# Altium PCB AtlysAFE.PcbDoc (part 2 of 2)
Units mm, origin at the board's own origin, x right, y up, seen from the top; angles counter-clockwise.
Board outline 100 x 101.6 mm, 6 copper layers (Top Layer, Internal Plane 1, Internal Plane 2, Internal Plane 3, Internal Plane 4, Bottom Layer), stack 1.611 mm thick; 311 components, 255 nets, 1157 pads, 209 vias.
Unrouted connection lines stored in the file: 701.
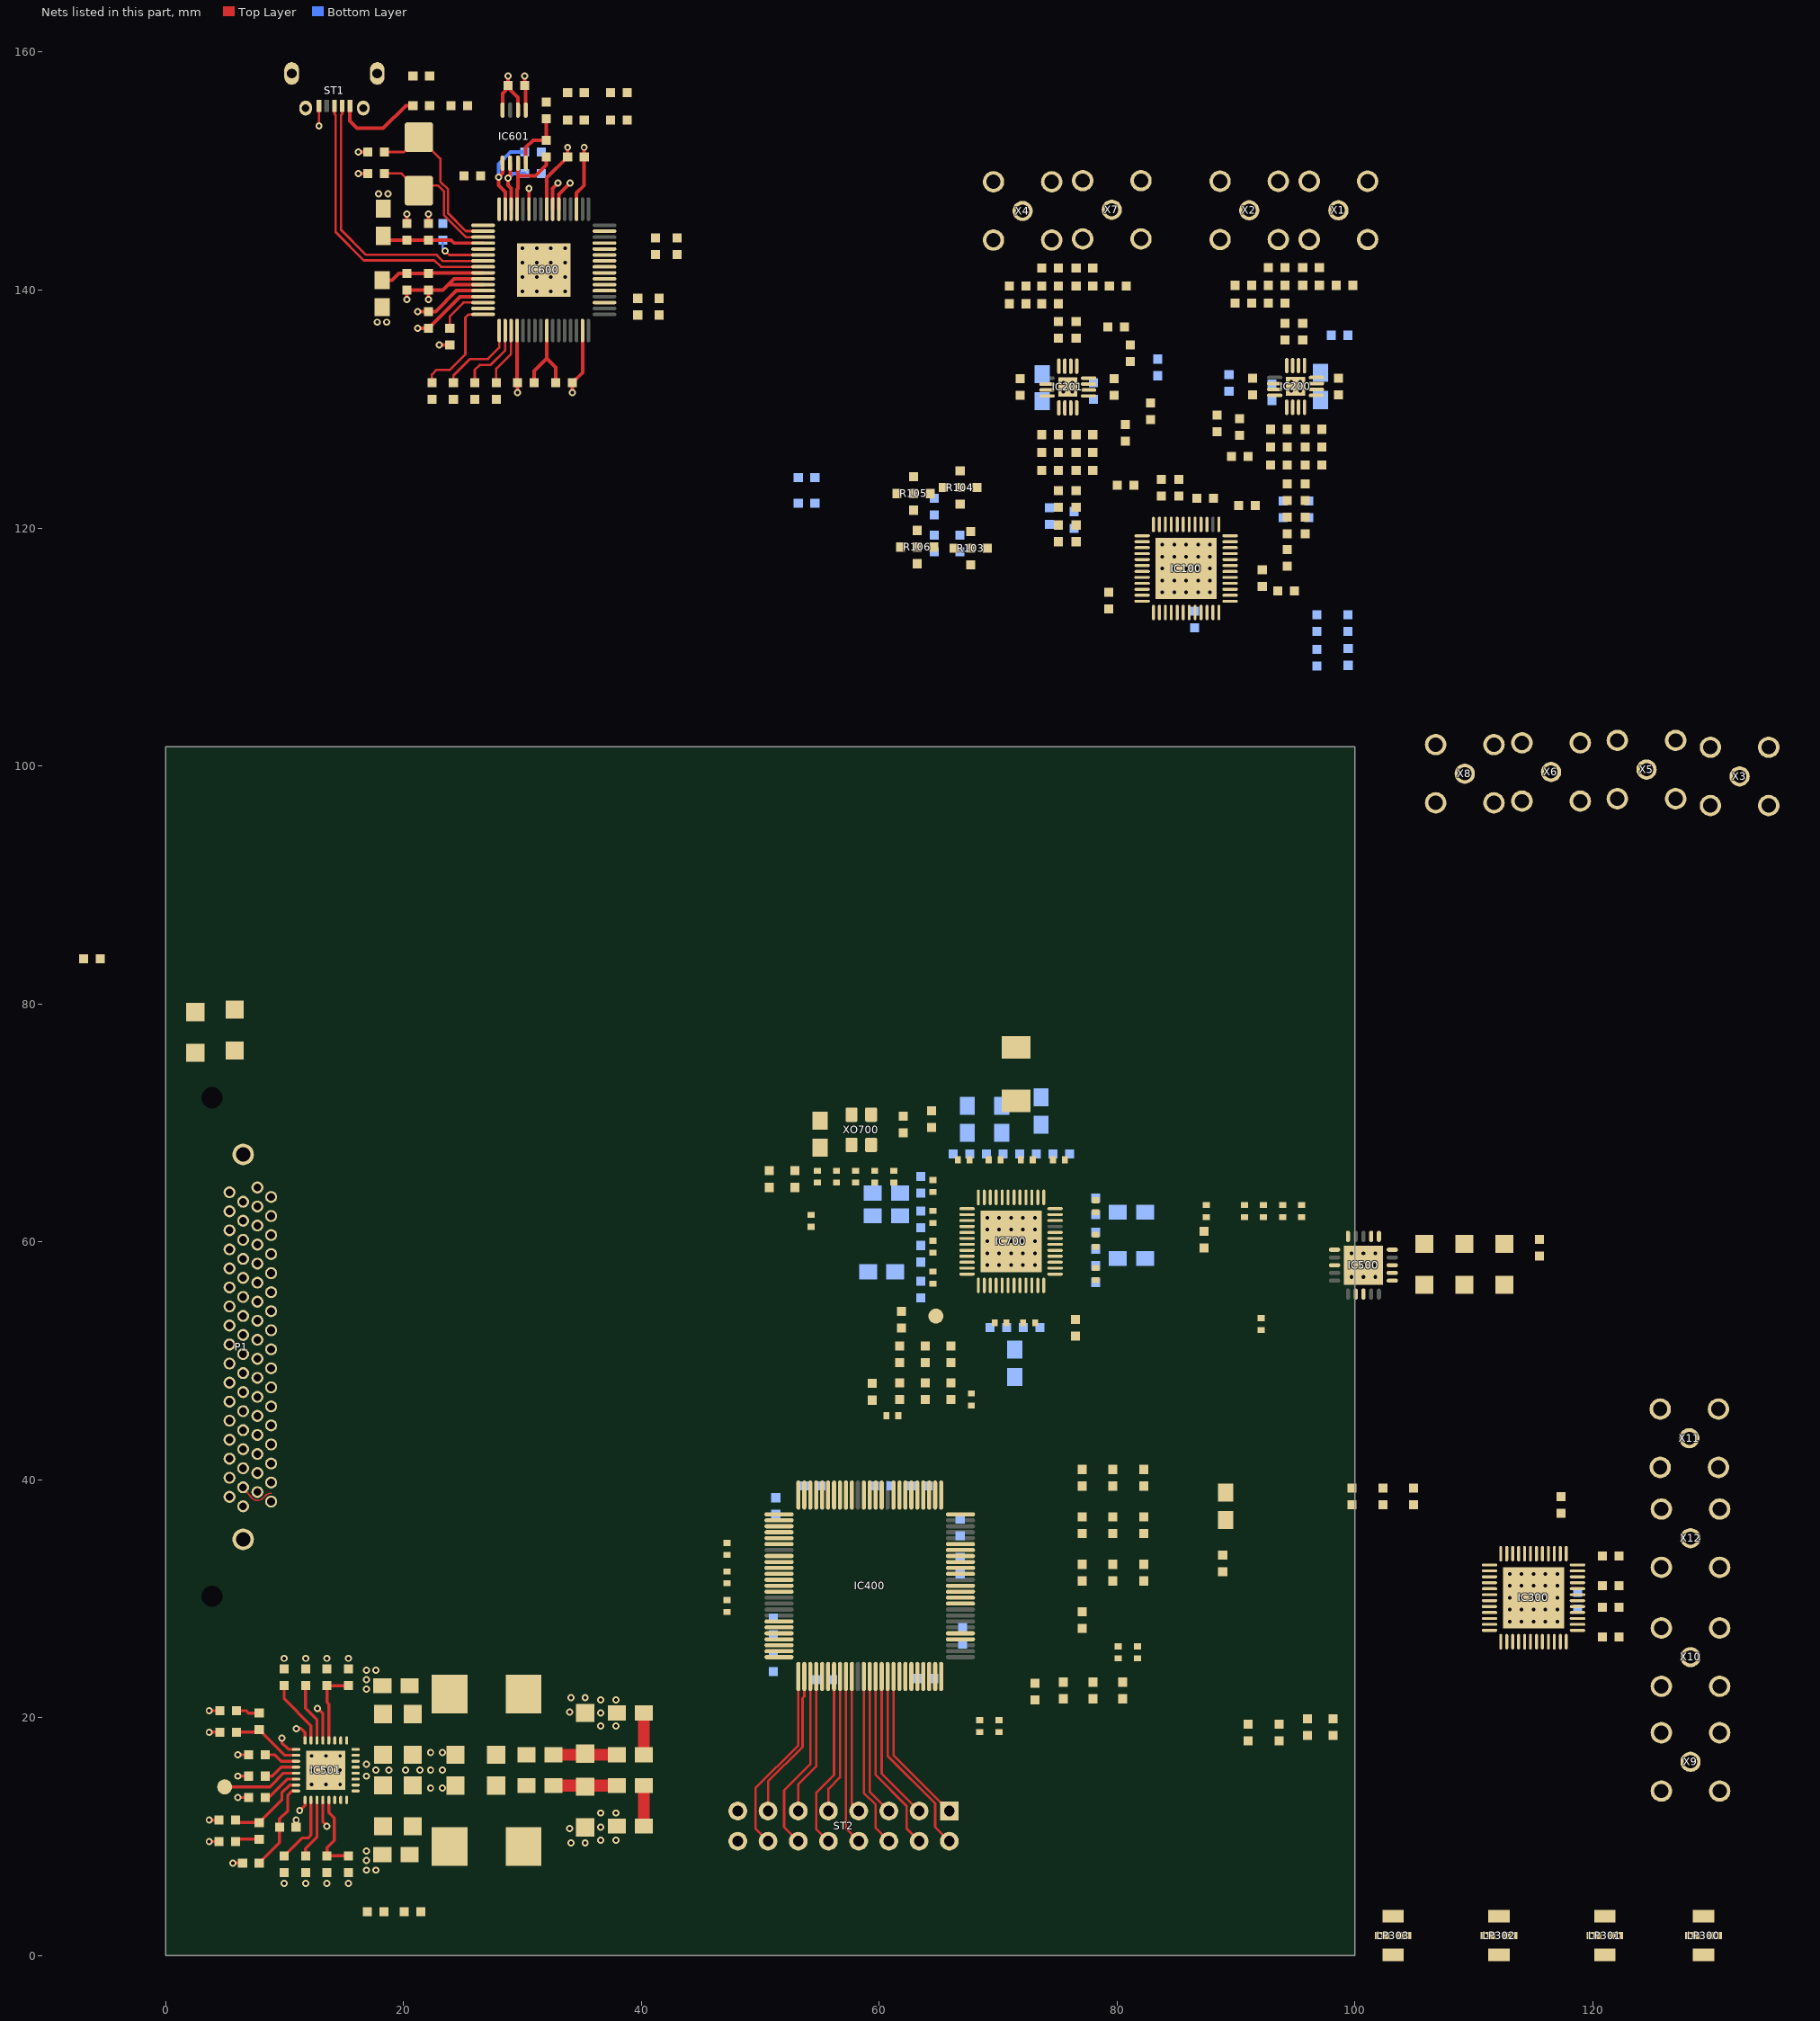
[diagram p6: the nets of this part, all layers, seen from the top]

## Part data
C1 C100 C101 C102 C103 C104 C105 C106 C107 C108 C109 C110 C111 C112 C113 C114 C115 C116 C117 C155 C200 C201 C202 C204 C205 C206 C207 C208 C209 C211 C212 C213 C214 C215 C300 C301 C302 C303 C304 C305 C306 C307 C308 C309 C310 C311 C312 C313 C314 C400 C401 C402 C403 C404 C405 C406 C407 C408 C409 C410 C500 C501 C502 C503 C504 C505 C506 C507 C508 C509 C510 C511 C512 C513 C514 C515 C516 C517 C518 C519 C520 C521 C522 C600 C601 C602 C603 C604 C605 C606 C607 C608 C609 C610 C611 C612 C613 C614 C615 C700 C701 C702 C703 C704 C705 C706 C707 C708 C709 C710 C711 C712 C713 C714 C715 C716 C717 C718 C719 C720 C721 C722 C723 C726 C727 C729 C730 C732 C733 C734 C735 C736 C737 C738 C739: library part C, "C"
D400 D401 D402 D600 D601 D700: library part "LED SMD", "WURTH 150060VS75000"
D403: library part "LED SMD", "WURTH 150060SS75000"
FB700 FB701 FB702 FB703 FB704 FB705 FB706 FB707 FB708 L700: library part L, "L"
IC100: library part ADS6245_2WIRE, "DUAL CHANNEL, 14-BIT, 125/105/80/65 MSPS ADC WITH SERIAL LVDS OUTPUTS"
IC200 IC201: "WIDEBAND, LOW-NOISE, LOW-DISTORTION, FULLY-DIFFERENTIAL AMPLIFIER"
IC300: "Dual-Channel,  16-Bit,  800  MSPS,  Digital-to-Analog  Converter  (DAC)"
IC400: "Lattice MachXO2"
IC500: "36V, 1A, Low Noise, RF LDO Voltage Regulator"
IC501: "Configurable DC/DC Sync. Buck, Dual 2A / Single 4A"
IC600: "DUAL HIGH SPEED USB TO MULTIPURPOSE UART/FIFO IC"
IC601: "2K Microwire Compatible Serial EEPROM"
IC700: "Five/Ten Output Clock Generator/Jitter Cleaner With Integrated Dual VCOs"
L300 L600 L601: library part L
L500 L502 L503 L504 L506 L507: library part L, "742792023"
L501 L505: library part L, "DR74-XXX-R"
LP300 LP301 LP302 LP303: library part LFCN-X, "LFCN Low Pass FIlter"
P1: library part MALE_VHDCI-68, "68-Pin VHDCI Connector"
Q600 Q700: library part CRYSTAL, "XX MHz"
R1 R2 R100 R101 R102 R107 R108 R109 R110 R111 R112 R113 R114 R115 R116 R117 R118 R119 R120 R121 R200 R201 R202 R203 R204 R207 R208 R209 R210 R211 R212 R213 R214 R215 R216 R217 R218 R219 R222 R223 R224 R225 R226 R227 R228 R229 R300 R301 R302 R303 R304 R305 R306 R307 R308 R400 R401 R402 R403 R404 R405 R406 R500 R501 R502 R503 R504 R505 R506 R507 R508 R509 R510 R511 R600 R601 R602 R603 R604 R605 R606 R607 R608 R609 R610 R611 R612 R613 R700 R701 R702 R703 R704 R705 R706 R707 R708 R709 R710 R711 R712 R713 R714 R715: library part R, "R"
ST1: "USB Micro B Buchse"
ST2: library part 16POLPF, "16POLPF"
TP500: "Test Pad"
X1 X2 X3 X4 X5 X6 X7 X8 X9 X10 X11 X12: "MCX Connector"
XO700: library part "OSZILLATOR_4P SMD"

## Via types
v1: diameter 0.6, hole 0.3, Top Layer to Bottom Layer, 123 vias
v2: diameter 0.6, hole 0.3, Top Layer to Bottom Layer, tented both sides, 44 vias
v3: diameter 0.6, hole 0.3, Top Layer to Bottom Layer, tented top, 33 vias
v4: diameter 0.66, hole 0.33, Top Layer to Bottom Layer, tented top, 9 vias

## Nets (pads, with @x,y where several pads share a name; then routed paths per layer and width w, separated by ;. In a path a pad name is that pad's centre, name@x,y a point inside that pad or via, vN(x,y) a via of type N, cw(c..) or ccw(c..) an arc to the next point about the centre after c; other vN are vias at no path point)
1V8D: C306.1 C307.1 C309.1 C310.1 C410.1 C519.1 IC300.2 IC300.8 IC300.29 IC300.36 IC300.41 IC400.11 L300.1 L507.2 | length 3.4
  Top Layer w1: C519.1@40.218,10.9 L507.2@40.218,14.3
3V3A: C100.1 C101.1 C102.1 C200.1 C201.1 C202.1 C208.1 C209.1 C211.1 C302.1 C303.1 C304.1 C305.1 C501.1 C502.1 FB701.2 FB702.2 FB704.2 FB706.2 FB707.2 FB708.2 IC100.7 IC100.13 IC100.24 IC200.5 IC200.6 IC200.7 IC200.8 IC201.5 IC201.6 IC201.7 IC201.8 IC300.37 IC300.40 IC300.42 IC300.45 IC300.48 IC500.1 IC500.3 IC500.20 R202.1 R217.1
3V3D: C103.1 C104.1 C105.1 C400.1 C401.1 C404.1 C405.1 C406.1 C407.1 C408.1 C409.1 C510.1 C718.1 C719.1 FB700.1 FB703.1 FB705.1 IC100.2 IC100.5 IC100.36 IC400.5 IC400.23 IC400.26 IC400.46 IC400.50 IC400.55 IC400.73 IC400.100 IC700.15 L503.2 L700.1 R100.2 R103.5 R104.5 R105.5 R106.5 R108.1 R109.1 R122.1 R123.1 R704.2 R706.2 R707.2 R708.2 R714.2 ST2.15 | length 3.5
  Top Layer w1: L503.2@40.218,16.9 C510.1@40.218,20.4
5VD: C503.1 IC500.15 IC500.16 L500.1 L504.1 P1.17 P1.18 P1.51 P1.52 R500.1 R501.2 R504.1 R506.2 R509.2 | length 1.7
  Top Layer w0.25: v1(5.675,7.8) R501.2@6.476,7.8 ; v1(6.075,15.1) R500.1@6.976,15.1
  other v2: 15.375,6.1 16.875,7.2 17.675,7.2 16.875,8 16.875,8.8 16.875,22.4 16.875,23.2 16.875,24 17.675,24 15.375,25
+1V8D: C600.1 C601.1 C602.1 C603.1 IC600.12 IC600.37 IC600.64 | length 6.2
  Top Layer w0.3: v1(21.202,138.198) C603.1@22.1,138.198 22.698,138.198 24.45,139.95 IC600.12@26.7,139.95
+3V3D: C604.1 C605.1 C606.1 C607.1 C608.1 C615.1 D600.A D601.A IC600.20 IC600.31 IC600.42 IC600.56 IC601.6 IC601.8 L600.1 L601.1 R604.2 R608.2 R609.2 R610.2 | length 22.7
  Top Layer w0.3: v1(23.002,135.401) R604.2@23.9,135.401 ; IC601.8@28.325,155.13 28.325,156.525 28.8,157 29.625,156.175 IC601.6@29.625,155.13 ; C615.1@28.802,157.2 v1(28.802,157.998) ; IC600.20@29.55,136.6 29.55,132.252 C608.1@29.602,132.2 v1(29.602,131.398) ; IC600.56@32.05,146.8 32.05,149.448 C605.1@33.802,151.2 v1(33.802,151.998) ; v1(34.198,131.398) C607.1@34.198,132.2 35.05,133.052 IC600.31@35.05,136.6
  other v1: 17.8,137.3 18.6,137.3 17.9,148.1 18.7,148.1
ADC_CLK_N: C119.2 IC100.19
ADC_CLK_P: C118.2 IC100.18
CLK_ADC_N: C119.1 IC700.28 R123.2 R125.1
CLK_ADC_P: C118.1 IC700.27 R122.2 R124.1
CLK_DAC_N: C312.1 IC700.20 R305.1
CLK_DAC_P: C311.1 IC700.19 R304.1
CLK_EXT_N: IC700.7 R711.1
CLK_EXT_P: IC700.6 R710.1
CLK_FPGA_N: IC400.85 IC700.10
CLK_FPGA_P: IC400.86 IC700.9
CLK_REF: C737.2 IC700.45 R704.1 R705.2
CLK_REF_EXT_N: C739.2 IC700.2 R714.1 R715.2
CLK_REF_EXT_P: C738.2 IC700.3 R706.1 R709.2
DAC_OSTR_N: C314.1 IC700.17 R308.1
DAC_OSTR_P: C313.1 IC700.16 R307.1
DACA_OUT_N: IC300.39 LP301.1
DACA_OUT_P: IC300.38 LP300.1
DACB_OUT_N: IC300.46 LP303.1
DACB_OUT_P: IC300.47 LP302.1
FPGA_PGOOD: IC400.74 IC501.12 IC501.29 R504.2 R505.1 | length 5.2
  Top Layer w0.25: v1(12.775,20.8) 13.225,20.35 IC501.29@13.225,18.1 ; IC501.12@13.225,13.1 13.225,11.25 v1(13.575,10.9)
GND: C1.2 C100.2 C101.2 C102.2 C103.2 C104.2 C105.2 C106.2 C107.2 C108.2 C109.2 C112.2 C113.2 C116.2 C117.2 C155.1 C200.2 C201.2 C202.2 C204.2 C205.2 C206.2 C207.2 C208.2 C209.2 C211.2 C212.2 C213.2 C214.2 C215.2 C300.2 C301.2 C302.2 C303.2 C304.2 C305.2 C306.2 C307.2 C308.1 C309.2 C310.2 C400.2 C401.2 C402.2 C403.2 C404.2 C405.2 C406.2 C407.2 C408.2 C409.2 C410.2 C500.1 C501.2 C502.2 C503.2 C504.1 C505.2 C506.2 C507.2 C508.2 C509.2 C510.2 C511.2 C512.2 C513.2 C514.2 C515.2 C516.2 C517.2 C518.2 C519.2 C520.2 C521.2 C522.2 C600.2 C601.2 C602.2 C603.2 C604.2 C605.2 C606.2 C607.2 C608.2 C609.2 C610.2 C611.2 C612.2 C613.2 C614.2 C615.2 C700.2 C701.2 C702.2 C703.2 C704.2 C705.2 C706.2 C707.2 C708.2 C709.2 C710.2 C711.2 C712.2 C713.2 C714.2 C715.2 C716.2 C717.2 C718.2 C719.2 C720.2 C721.2 C722.2 C723.2 C726.2 C727.2 C729.2 C730.2 C732.2 C733.2 C734.2 D400.K D401.K D402.K D403.K D700.K IC100.0 IC100.1 IC100.6 IC100.8 IC100.9 IC100.12 IC100.17 IC100.20 IC100.25 IC100.28 IC100.29 IC100.35 IC200.0 IC200.13 IC200.14 IC200.15 IC200.16 IC201.0 IC201.13 IC201.14 IC201.15 IC201.16 IC300.0 IC300.5 IC400.6 IC400.22 IC400.33 IC400.44 IC400.56 IC400.72 IC400.79 IC400.92 IC500.0 IC500.7 IC500.8 IC500.11 IC500.12 IC501.0 IC501.1 IC501.19 IC501.20 IC501.21 IC501.22 IC600.0 IC600.1 IC600.5 IC600.10 IC600.11 IC600.13 IC600.15 IC600.25 IC600.35 IC600.47 IC600.51 IC601.5 IC700.0 IC700.36 IC700.46 LP300.2 LP300.4 LP301.2 LP301.4 LP302.2 LP302.4 LP303.2 LP303.4 P1.2 P1.5 P1.8 P1.11 P1.14 P1.21 P1.24 P1.27 P1.30 P1.33 P1.36 P1.39 P1.42 P1.45 P1.48 P1.55 P1.58 P1.61 P1.64 P1.67 Q700.2 R1.2 R2.1 R102.1 R103.2 R104.2 R105.2 R106.2 R124.2 R125.2 R212.1 R213.1 R227.1 R228.1 R302.2 R304.2 R305.2 R307.2 R308.2 R502.2 R503.2 R505.2 R507.2 R510.2 R611.1 R612.1 R701.2 R705.1 R709.1 R712.1 R713.1 R715.1 ST1.5 ST2.16 X1.1 X2.1 X3.1 X4.1 X5.1 X6.1 X7.1 X8.1 X9.1 X10.1 X11.1 X12.1 XO700.2 | length 45.6
  Top Layer w0.2: v1(12.9,153.8) ST1.5@12.9,155.475
  Top Layer w0.25: v1(3.675,9.6) C522.2@4.476,9.6 ; v1(3.675,11.4) C521.2@4.476,11.4 ; v1(3.675,18.8) C512.2@4.576,18.8 ; v1(3.675,20.6) C513.2@4.576,20.6 ; v1(6.075,13.3) R503.2@6.976,13.3 ; v1(6.075,16.9) R502.2@6.976,16.9 ; v1(9.775,18.3) 9.775,17.9 10.325,17.35 IC501.1@10.975,17.35 ; C500.1@10.973,10.8 v1(10.973,11.399)
  Top Layer w0.3: v1(16.2,149.8) C614.2@17.002,149.8 ; v1(16.2,151.6) C613.2@17.002,151.6 ; v1(20.3,139.2) C611.2@20.3,140.002 C612.2@22.1,140.002 ; C609.2@20.3,145.598 v1(20.3,146.4) ; v1(21.201,136.801) C603.2@22.1,136.801 24.748,139.45 IC600.13@26.7,139.45 ; v1(22.1,139.2) C612.2@22.1,140.002 ; C610.2@22.1,145.598 v1(22.1,146.4) ; IC600.11@26.7,140.45 23.75,140.45 ; IC600.10@26.7,140.95 24.25,140.95 23.75,140.45 ; v1(30.199,157.999) C615.2@30.199,157.2 30.275,157.124 IC601.5@30.275,155.13 ; 31,132.6 31,133.2 32.05,134.25 ; IC600.25@32.05,136.6 32.05,134.25 ; C607.2@32.801,132.2 32.801,133.498 32.05,134.25 ; IC600.51@34.55,146.8 34.55,148.15 35.199,148.799 C605.2@35.199,151.2 v1(35.199,151.998) ; C612.2@22.1,140.002 23.302,140.002 23.75,140.45
  other v1: 102.082,1.7 104.317,1.7 110.982,1.7 113.217,1.7 119.882,1.7 122.117,1.7 128.182,1.7 130.417,1.7 113,28.1 114,28.1 115,28.1 116,28.1 117,28.1 113,29.1 114,29.1 115,29.1 116,29.1 117,29.1 113,30.1 114,30.1 115,30.1 116,30.1 117,30.1 113,31.1 114,31.1 115,31.1 116,31.1 117,31.1 113,32.1 114,32.1 115,32.1 116,32.1 117,32.1 69.079,58.042 70.079,58.042 71.079,58.042 72.079,58.042 73.079,58.042 69.079,59.042 70.079,59.042 71.079,59.042 72.079,59.042 73.079,59.042 69.079,60.042 70.079,60.042 71.079,60.042 72.079,60.042 73.079,60.042 69.079,61.042 70.079,61.042 71.079,61.042 72.079,61.042 73.079,61.042 69.079,62.042 70.079,62.042 71.079,62.042 72.079,62.042 73.079,62.042 83.8,114.6 84.8,114.6 85.8,114.6 86.8,114.6 87.8,114.6 83.8,115.6 84.8,115.6 85.8,115.6 86.8,115.6 87.8,115.6 83.8,116.6 84.8,116.6 85.8,116.6 86.8,116.6 87.8,116.6 83.8,117.6 84.8,117.6 85.8,117.6 86.8,117.6 87.8,117.6 83.8,118.6 84.8,118.6 85.8,118.6 86.8,118.6 87.8,118.6
  other v2: 9.975,6.1 11.775,6.1 13.575,6.1 34.075,9.5 35.275,9.5 36.575,9.7 37.875,9.7 33.975,10.7 36.575,10.8 36.575,12 37.875,12 22.275,14.1 23.275,14.1 16.875,15.1 17.675,15.6 18.775,15.6 20.175,15.6 21.375,15.6 22.275,15.6 23.275,15.6 16.875,16.1 22.275,17.1 23.275,17.1 36.575,19.3 37.875,19.3 36.575,20.4 33.975,20.5 36.575,21.5 37.875,21.5 34.075,21.7 35.275,21.7 9.975,25 11.775,25 13.575,25
  other v3: 12.275,14.4 13.475,14.4 14.675,14.4 12.275,15.6 13.475,15.6 14.675,15.6 12.275,16.8 13.475,16.8 14.675,16.8 75.469,131.469 76.231,131.469 94.619,131.519 95.381,131.519 75.469,132.231 76.231,132.231 94.619,132.281 95.381,132.281 30,139.9 31.2,139.9 32.4,139.9 33.6,139.9 30,141.1 31.2,141.1 32.4,141.1 33.6,141.1 30,142.3 31.2,142.3 32.4,142.3 33.6,142.3 30,143.5 31.2,143.5 32.4,143.5 33.6,143.5
  other v4: 99.704,57.042 100.704,57.042 101.704,57.042 99.704,58.042 100.704,58.042 101.704,58.042 99.704,59.042 100.704,59.042 101.704,59.042
INA_N: IC100.10 R117.2
INA_P: IC100.11 R116.2
INB_N: IC100.27 R121.2
INB_P: IC100.26 R119.2
IO1_N: IC100.48 P1.35
IO1_P: IC100.47 P1.1
IO2_N: IC100.46 P1.37
IO2_P: IC100.45 P1.3
IO3_N: IC100.40 P1.38
IO3_P: IC100.39 P1.4
IO4_N: IC100.38 P1.40
IO4_P: IC100.37 P1.6
IO5_N: IC100.44 P1.41
IO5_P: IC100.43 P1.7
IO6_N: IC100.42 P1.43
IO6_P: IC100.41 P1.9
IO7_N: IC300.10 P1.44
IO7_P: IC300.9 P1.10
IO8_N: IC300.12 P1.46
IO8_P: IC300.11 P1.12
IO9_N: IC300.14 P1.47
IO9_P: IC300.13 P1.13
IO10_N: IC300.16 P1.49
IO10_P: IC300.15 P1.15
IO11_N: IC300.22 P1.54
IO11_P: IC300.21 P1.20
IO12_N: IC300.24 P1.56
IO12_P: IC300.23 P1.22
IO13_N: IC300.26 P1.57
IO13_P: IC300.25 P1.23
IO14_N: IC300.28 P1.59
IO14_P: IC300.27 P1.25
IO15_N: IC300.18 P1.60
IO15_P: IC300.17 P1.26
IO16_N: IC300.20 P1.62
IO16_P: IC300.19 P1.28
IO17_N: IC400.35 P1.63 R400.1
IO17_P: IC400.34 P1.29 R400.2
IO18_N: IC400.37 P1.65 R401.1
IO18_P: IC400.36 P1.31 R401.2
IO19_N: IC400.39 P1.66 R402.1 | length 3
  Top Layer w0.127: P1.66@6.525,39.375 7.19,38.526 ; 7.189,38.525 ccw(c7.725,38.975) 8.22,38.48 8.38,38.67 cw(c8.875,38.175) 8.875,38.875
IO19_P: IC400.38 P1.32 R402.2
IO20_N: IC400.87 P1.68
IO20_P: IC400.88 P1.34
JTAG_TCK: IC400.91 R600.2
JTAG_TDI: IC400.94 R601.2
JTAG_TDO: IC400.95 R602.2
JTAG_TMS: IC400.90 R603.2
NetC1_1: C1.1 P1.0 R1.1
NetC106_1: C106.1 C107.1 C108.1 IC100.16 R112.1 R113.1 R114.1 R115.1 R201.1 R216.1
NetC109_1: C109.1 IC100.3
NetC110_1: C110.1 R112.2 R116.1
NetC110_2: C110.2 C112.1 R110.1
NetC111_1: C111.1 R113.2 R117.1
NetC111_2: C111.2 C113.1 R111.1
NetC114_1: C114.1 R114.2 R119.1
NetC114_2: C114.2 C116.1 R118.1
NetC115_1: C115.1 R115.2 R121.1
NetC115_2: C115.2 C117.1 R120.1
NetC155_2: C155.2 L700.2 XO700.1 XO700.4
NetC204_1: C204.1 IC200.4 IC200.9 R201.2 R202.2 R213.2
NetC205_1: C205.1 R209.1
NetC206_1: C206.1 R210.1
NetC207_1: C207.1 R211.1
NetC212_1: C212.1 IC201.4 IC201.9 R216.2 R217.2 R228.2
NetC213_1: C213.1 R224.1
NetC214_1: C214.1 R225.1
NetC215_1: C215.1 R226.1
NetC300_1: C300.1 C301.1 IC300.1 IC300.35 L300.2
NetC308_2: C308.2 IC300.44
NetC311_2: C311.2 IC300.3 R303.1
NetC312_2: C312.2 IC300.4 R303.2
NetC313_2: C313.2 IC300.6 R306.1
NetC314_2: C314.2 IC300.7 R306.2
NetC500_2: C500.2 IC501.8 R501.1 | length 7.5
  Top Layer w0.25: R501.1@7.873,7.8 9.576,9.503 9.576,11.502 10.275,12.2 10.275,13.5 10.625,13.85 IC501.8@10.975,13.85
NetC504_2: C504.2 IC500.17
NetC505_1: C505.1 C506.1 IC501.25 IC501.26 IC501.27 L500.2
NetC507_1: C507.1 IC501.28 R506.1 | length 6.5
  Top Layer w0.25: IC501.28@13.725,18.1 13.725,21.15 13.575,21.3 C507.1@13.575,22.702 R506.1@15.375,22.702
NetC508_1: C508.1 L501.2 L502.1
NetC509_1: C509.1 IC501.32 L502.2 L503.1 | length 6.9
  Top Layer w0.25: v1(10.975,19.1) 11.375,19.1 11.725,18.75 IC501.32@11.725,18.1
  Top Layer w1: L502.2@32.618,16.9 L503.1@37.932,16.9
NetC511_1: C511.1 IC501.30 | length 5
  Top Layer w0.25: C511.1@11.775,22.702 11.775,20.8 12.725,19.85 IC501.30@12.725,18.1
NetC512_1: C512.1 IC501.2 R508.1 | length 6
  Top Layer w0.25: C512.1@5.973,18.8 7.673,18.8 R508.1@7.875,19.002 7.875,19 10.025,16.85 IC501.2@10.975,16.85
NetC513_1: C513.1 R508.2 | length 2
  Top Layer w0.25: C513.1@5.973,20.6 6.775,20.6 6.976,20.399 R508.2@7.875,20.399
NetC514_1: C514.1 C515.1 IC501.14 IC501.15 IC501.16 L504.2
NetC516_1: C516.1 IC501.13 R509.1 | length 6.9
  Top Layer w0.25: IC501.13@13.725,13.1 13.725,12.05 14.175,11.6 14.175,9.7 13.575,9.1 C516.1@13.575,8.399 R509.1@15.375,8.399
NetC517_1: C517.1 L505.2 L506.1
NetC518_1: C518.1 IC501.9 L506.2 L507.1 | length 6.4
  Top Layer w0.25: v1(11.275,12.2) 11.725,12.65 IC501.9@11.725,13.1
  Top Layer w1: L506.2@32.618,14.3 L507.1@37.932,14.3
NetC520_1: C520.1 IC501.11 | length 5.1
  Top Layer w0.25: C520.1@11.775,8.399 11.775,9 12.725,9.95 IC501.11@12.725,13.1
NetC521_1: C521.1 IC501.7 R511.1 | length 6.6
  Top Layer w0.25: C521.1@6.075,11.199 R511.1@7.875,11.199 9.775,13.099 9.775,13.7 10.425,14.35 IC501.7@10.975,14.35
NetC522_1: C522.1 R511.2 | length 2.1
  Top Layer w0.25: C522.1@5.873,9.6 6.075,9.802 R511.2@7.875,9.802
NetC609_1: C609.1 C610.1 IC600.4 L600.2 | length 8.1
  Top Layer w0.3: L600.2@18.655,144.201 C609.1@20.3,144.201 C610.1@22.1,144.201 23.999,144.201 24.25,143.95 IC600.4@26.7,143.95
NetC611_1: C611.1 C612.1 IC600.9 L601.2 | length 8.7
  Top Layer w0.3: L601.2@18.2,140.843 19.043,140.843 19.599,141.399 C611.1@20.3,141.399 C612.1@22.1,141.399 ; C612.1@22.151,141.45 IC600.9@26.7,141.45
NetC613_1: C613.1 IC600.2 Q600.2 | length 14.4
  Top Layer w0.2: C613.1@18.399,151.6 20.05,151.6 Q600.2@21.3,152.85 23.1,151.05 23.1,149.1 23.75,148.45 23.75,146.445 25.245,144.95 IC600.2@26.7,144.95
NetC614_1: C614.1 IC600.3 Q600.1 | length 12.1
  Top Layer w0.2: C614.1@18.399,149.8 19.85,149.8 Q600.1@21.3,148.35 21.75,148.8 22.9,148.8 23.4,148.3 23.4,146.3 25.25,144.45 IC600.3@26.7,144.45
NetC700_1: C700.1 C701.1 C702.1 C703.1 FB700.2 IC700.8 IC700.11
NetC704_1: C704.1 C705.1 FB701.1 IC700.5
NetC706_1: C706.1 C707.1 C708.1 C709.1 FB702.1 IC700.39 IC700.42
NetC710_1: C710.1 C711.1 C712.1 C713.1 FB703.2 IC700.18 IC700.21
NetC714_1: C714.1 C715.1 FB704.1 IC700.47
NetC716_1: C716.1 C717.1 FB706.1 IC700.1
NetC720_1: C720.1 C721.1 FB707.1 IC700.44
NetC722_1: C722.1 C723.1 C726.1 C727.1 FB705.2 IC700.26 IC700.29 IC700.32
NetC729_1: C729.1 C730.1 FB708.1 IC700.34 IC700.35
NetC732_1: C732.1 IC700.48
NetC733_1: C733.1 IC700.38
NetC734_1: C734.1 IC700.4
NetC735_1: C735.1 C736.2 IC700.41
NetC735_2: C735.2 R703.2
NetC736_1: C736.1 IC700.40 R703.1
NetC737_1: C737.1 XO700.3
NetC738_1: C738.1 X3.2
NetC739_1: C739.1 X6.2
NetD400_A: D400.A R403.2
NetD401_A: D401.A R404.2
NetD402_A: D402.A R405.2
NetD403_A: D403.A R406.2
NetD600_K: D600.K R605.1
NetD601_K: D601.K R606.1
NetD700_A: D700.A R702.1
NetIC100_4: IC100.4 IC400.25
NetIC100_15: IC100.15 R106.1
NetIC100_21: IC100.21 R105.1
NetIC100_22: IC100.22 R104.1
NetIC100_23: IC100.23 R103.1
NetIC100_30: IC100.30 IC400.24 R109.2
NetIC100_31: IC100.31 IC400.21 R108.2
NetIC100_32: IC100.32 IC400.18
NetIC100_33: IC100.33 R107.2
NetIC100_34: IC100.34 IC400.20
NetIC200_2: IC200.2 R208.1 R214.2
NetIC200_3: IC200.3 R110.2 R214.1
NetIC200_10: IC200.10 R111.2 R200.1
NetIC200_11: IC200.11 R200.2 R204.1
NetIC200_12: IC200.12 IC400.27 R212.2
NetIC201_2: IC201.2 R223.1 R229.2
NetIC201_3: IC201.3 R118.2 R229.1
NetIC201_10: IC201.10 R120.2 R215.1
NetIC201_11: IC201.11 R215.2 R219.1
NetIC201_12: IC201.12 IC400.28 R227.2
NetIC300_30: IC300.30 IC400.14
NetIC300_31: IC300.31 R301.2
NetIC300_32: IC300.32 IC400.12
NetIC300_33: IC300.33 IC400.16
NetIC300_34: IC300.34 R300.1
NetIC300_43: IC300.43 R302.1
NetIC400_1: IC400.1 IC600.38
NetIC400_2: IC400.2 IC600.39
NetIC400_3: IC400.3 IC600.40
NetIC400_4: IC400.4 IC600.41
NetIC400_7: IC400.7 IC600.43
NetIC400_8: IC400.8 IC600.44
NetIC400_9: IC400.9 IC600.45
NetIC400_13: IC400.13 R300.2
NetIC400_17: IC400.17 R301.1
NetIC400_19: IC400.19 R107.1
NetIC400_29: IC400.29 IC700.14
NetIC400_30: IC400.30 IC700.31
NetIC400_31: IC400.31 IC700.12
NetIC400_45: IC400.45 IC700.22
NetIC400_47: IC400.47 R700.1
NetIC400_48: IC400.48 IC700.24
NetIC400_49: IC400.49 IC700.25
NetIC400_51: IC400.51 ST2.14 | length 15.8
  Top Layer w0.2: ST2.14@50.65,9.63 49.6,10.68 49.6,14.1 53.2,17.7 IC400.51@53.2,23.475
NetIC400_52: IC400.52 ST2.13 | length 12.6
  Top Layer w0.2: ST2.13@50.65,12.17 50.65,14.655 53.55,17.555 53.55,21.65 53.7,21.8 IC400.52@53.7,23.475
NetIC400_53: IC400.53 ST2.12 | length 15.2
  Top Layer w0.2: ST2.12@53.19,9.63 52,10.82 52,13.9 54.2,16.1 IC400.53@54.2,23.475
NetIC400_54: IC400.54 ST2.11 | length 11.9
  Top Layer w0.2: ST2.11@53.19,12.17 53.19,14.39 54.7,15.9 IC400.54@54.7,23.475
NetIC400_57: IC400.57 ST2.10 | length 14.9
  Top Layer w0.2: ST2.10@55.73,9.63 54.693,10.667 54.693,13.693 56.2,15.2 IC400.57@56.2,23.475
NetIC400_58: IC400.58 ST2.9 | length 11.7
  Top Layer w0.2: ST2.9@55.73,12.17 55.73,14.03 56.7,15 IC400.58@56.7,23.475
NetIC400_59: IC400.59 ST2.8 | length 14.3
  Top Layer w0.2: IC400.59@57.2,23.475 57.2,10.7 ST2.8@58.27,9.63
NetIC400_60: IC400.60 ST2.7 | length 11.5
  Top Layer w0.2: IC400.60@57.7,23.475 57.7,12.74 ST2.7@58.27,12.17
NetIC400_62: IC400.62 ST2.6 | length 14.7
  Top Layer w0.2: IC400.62@58.7,23.475 58.7,13.7 59.7,12.7 59.7,10.74 ST2.6@60.81,9.63
NetIC400_63: IC400.63 ST2.5 | length 12
  Top Layer w0.2: IC400.63@59.2,23.475 59.2,13.78 ST2.5@60.81,12.17
NetIC400_64: IC400.64 ST2.4 | length 15.4
  Top Layer w0.2: IC400.64@59.7,23.475 59.7,15.2 62.3,12.6 62.3,10.68 ST2.4@63.35,9.63
NetIC400_65: IC400.65 ST2.3 | length 12.6
  Top Layer w0.2: IC400.65@60.2,23.475 60.2,15.32 ST2.3@63.35,12.17
NetIC400_66: IC400.66 ST2.2 | length 16
  Top Layer w0.2: IC400.66@60.7,23.475 60.7,16.8 64.7,12.8 64.7,10.82 ST2.2@65.89,9.63
NetIC400_67: IC400.67 ST2.1 | length 13.2
  Top Layer w0.2: IC400.67@61.2,23.475 61.2,16.86 ST2.1@65.89,12.17
NetIC400_68: IC400.68 R406.1
NetIC400_69: IC400.69 R405.1
NetIC400_70: IC400.70 R404.1
NetIC400_71: IC400.71 R403.1
NetIC400_75: IC400.75 IC500.13
NetIC501_3: IC501.3 R502.1 | length 2.8
  Top Layer w0.25: R502.1@8.373,16.9 9.175,16.9 9.725,16.35 IC501.3@10.975,16.35
NetIC501_4: IC501.4 R500.2 | length 2.9
  Top Layer w0.25: R500.2@8.373,15.1 8.975,15.1 9.725,15.85 IC501.4@10.975,15.85
NetIC501_5: IC501.5 TP500.0 | length 6.5
  Top Layer w0.25: TP500.0@4.975,14.2 8.775,14.2 9.925,15.35 IC501.5@10.975,15.35
NetIC501_6: IC501.6 R503.1 | length 3.2
  Top Layer w0.25: R503.1@8.373,13.3 8.675,13.3 10.225,14.85 IC501.6@10.975,14.85
NetIC501_10: IC501.10 R510.1 | length 5.9
  Top Layer w0.25: R510.1@9.975,8.399 11.476,9.9 11.975,9.9 12.225,10.15 IC501.10@12.225,13.1
NetIC501_17: IC501.17 IC501.18 L505.1
NetIC501_23: IC501.23 IC501.24 L501.1
NetIC501_31: IC501.31 R507.1 | length 5.5
  Top Layer w0.25: R507.1@9.975,22.702 9.975,21.6 12.225,19.35 IC501.31@12.225,18.1
NetIC600_6: IC600.6 R612.2 | length 4.3
  Top Layer w0.2: v1(23.5,143.3) 23.85,142.95 IC600.6@26.7,142.95
  Bottom Layer w0.2: R612.2@23.3,144.201 23.3,143.5 v1(23.5,143.3)
NetIC600_14: IC600.14 R604.1 | length 4.3
  Top Layer w0.2: R604.1@23.9,136.798 23.9,137.8 25.05,138.95 IC600.14@26.7,138.95
NetIC600_16: IC600.16 R600.1 | length 8.9
  Top Layer w0.2: R600.1@22.4,132.198 22.4,132.9 22.8,133.3 23.9,133.3 25.2,134.6 25.2,137.7 25.45,137.95 IC600.16@26.7,137.95
NetIC600_17: IC600.17 R601.1 | length 6.9
  Top Layer w0.2: R601.1@24.2,132.198 24.2,132.8 25.6,134.2 27.1,134.2 28.05,135.15 IC600.17@28.05,136.6
NetIC600_18: IC600.18 R602.1 | length 6
  Top Layer w0.2: R602.1@26,132.198 26,133.3 26.4,133.7 27.3,133.7 28.55,134.95 IC600.18@28.55,136.6
NetIC600_19: IC600.19 R603.1 | length 4.9
  Top Layer w0.2: R603.1@27.8,132.198 27.8,133.4 29.05,134.65 IC600.19@29.05,136.6
NetIC600_54: IC600.54 R605.2 | length 2.6
  Top Layer w0.3: IC600.54@33.05,146.8 33.05,148.05 v1(34,149)
NetIC600_55: IC600.55 R606.2 | length 2.4
  Top Layer w0.3: IC600.55@32.55,146.8 32.55,148.55 v1(33,149)
NetIC600_59: IC600.59 R607.2 R611.2 | length 1.8
  Top Layer w0.3: IC600.59@30.55,146.8 v1(30.55,148.55)
NetIC600_61: IC600.61 IC601.3 R613.2 | length 7.4
  Top Layer w0.3: IC600.61@29.55,146.8 29.55,148.45 29.625,148.525 29.625,149.597 ; IC601.3@29.625,150.67 29.625,149.597 ; R613.2@32,151.201 32,150.5 31.097,149.597 29.625,149.597
NetIC600_62: IC600.62 IC601.2 R609.1 | length 5.6
  Top Layer w0.3: IC601.2@28.975,150.67 28.975,149.575 v1(28.8,149.4) 28.8,148.8 29.05,148.55 IC600.62@29.05,146.8
  Bottom Layer w0.3: v1(28.8,149.4) 29.2,149.8 R609.1@30.202,149.8
NetIC600_63: IC600.63 IC601.1 R608.1 | length 7.9
  Top Layer w0.3: IC601.1@28.325,150.67 28.325,149.825 v1(28,149.5) 28,148.8 28.55,148.25 IC600.63@28.55,146.8
  Bottom Layer w0.3: v1(28,149.5) 28,150.6 29,151.6 R608.1@30.202,151.6
NetIC601_4: IC601.4 R610.1 R613.1 | length 5.1
  Top Layer w0.3: IC601.4@30.275,150.67 30.275,151.975 30.898,152.598 R613.1@32,152.598 R610.1@32,154.401
NetIC700_13: IC700.13 TP700.0
NetIC700_23: IC700.23 R700.2
NetIC700_30: IC700.30 R701.1
NetIC700_37: IC700.37 R702.2
NetIC700_43: IC700.43 Q700.1
NetLP300_3: LP300.3 X9.2
NetLP301_3: LP301.3 X10.2
NetLP302_3: LP302.3 X11.2
NetLP303_3: LP303.3 X12.2
NetR2_2: R2.2 ST1.0
NetR100_1: R100.1 R101.2 R103.4 R104.4 R105.4 R106.4
NetR101_1: R101.1 R102.2 R103.3 R104.3 R105.3 R106.3
NetR203_1: R203.1 X1.2
NetR203_2: R203.2 R204.2 R211.2
NetR207_1: R207.1 X2.2
NetR207_2: R207.2 R208.2 R209.2 R210.2
NetR218_1: R218.1 X7.2
NetR218_2: R218.2 R219.2 R226.2
NetR222_1: R222.1 X4.2
NetR222_2: R222.2 R223.2 R224.2 R225.2
NetR707_1: R707.1 R710.2 R712.2 X5.2
NetR708_1: R708.1 R711.2 R713.2 X8.2
USB_D_N: IC600.7 ST1.2 | length 23.5
  Top Layer w0.2: ST1.2@14.85,155.475 14.85,154.8 14.752,154.702 14.752,145.048 16.846,142.954 22.788,142.954 23.292,142.45 IC600.7@26.7,142.45
USB_D_P: IC600.8 ST1.3 | length 24.3
  Top Layer w0.2: ST1.3@14.2,155.475 14.2,154.8 14.298,154.702 14.298,144.86 16.658,142.5 22.6,142.5 23.15,141.95 IC600.8@26.7,141.95
USB_VBUS: R607.1 ST1.1 | length 7.6
  Top Layer w0.3: ST1.1@15.5,155.475 15.5,154.2 16.1,153.6 18.3,153.6 20.2,155.5 R607.1@20.802,155.5
VCC: C402.1 C403.1 IC400.80 IC400.93 P1.16 P1.19 P1.50 P1.53
pads on no net: IC100.14 IC200.1 IC201.1 IC400.10 IC400.15 IC400.32 IC400.40 IC400.41 IC400.42 IC400.43 IC400.61 IC400.76 IC400.77 IC400.78 IC400.81 IC400.82 IC400.83 IC400.84 IC400.89 IC400.96 IC400.97 IC400.98 IC400.99 IC500.2 IC500.4 IC500.5 IC500.6 IC500.9 IC500.10 IC500.14 IC500.18 IC500.19 IC600.21 IC600.22 IC600.23 IC600.24 IC600.26 IC600.27 IC600.28 IC600.29 IC600.30 IC600.32 IC600.33 IC600.34 IC600.36 IC600.46 IC600.48 IC600.49 IC600.50 IC600.52 IC600.53 IC600.57 IC600.58 IC600.60 IC601.7 IC700.33 P1. ST1.4
copper on no net: | length 1.9
  Top Layer w0.127: 7.23,40.08 ccw(c7.725,40.575) 8.22,40.08 8.38,40.27 cw(c8.875,39.775) 8.875,40.475

## Polygon pours and split planes (outlines as drawn)
NetIC501_23 on Top Layer "3V3_Switch" (solid, remove dead copper, pour order 33): 15.6,16.6 16.6,16.6 16.9,16.9 16.9,17.2 17.4,17.7 22.9,17.7 25.5,20.3 25.5,23.7 22,23.7 21.6,23.3 21.6,19.5 17,19.5 15.6,18.1
NetIC501_17 on Top Layer "1V8_Switch" (solid, remove dead copper, pour order 32): 15.6,14.6 16.6,14.6 16.9,14.3 16.9,14 17.4,13.5 22.9,13.5 25.5,10.9 25.5,7.5 22,7.5 21.6,7.9 21.6,11.7 17,11.7 15.6,13.1
GND on Top Layer "Switch_GND" (solid, remove dead copper, pour order 26): 25.3,17.7 25.3,13.5 17.6,13.5 16.5,14.6 16.1,14.6 15.6,14.6 15.6,16.6 16.5,16.6 17.6,17.7 17.7,17.7
NetC514_1 on Top Layer "1V8_Supply_Filtered" (solid, remove dead copper, pour order 27): 21.6,7.7 21.6,11.7 17.1,11.7 15.3,13.5 14,13.5 14,12.5 14.6,11.9 16.7,9.8 19.3,9.8 19.6,9.5 19.6,7.7
5VD on Top Layer "1V8_Supply" (solid, remove dead copper, pour order 45): 19.2,7.7 18.2,6.7 16.4,6.7 16.4,9.2 16.5,9.3 19.1,9.3 19.2,9.2
5VD on Top Layer "3V3_Supply" (solid, remove dead copper, pour order 44): 19.2,23.5 18.2,24.5 16.4,24.5 16.4,22 16.5,21.9 19.1,21.9 19.2,22
NetC505_1 on Top Layer "3V3_Supply_Filtered" (solid, remove dead copper, pour order 30): 21.6,23.5 21.6,19.5 17.1,19.5 15.3,17.7 14,17.7 14,18.5 14.2,18.7 16.9,21.4 19.3,21.4 19.6,21.7 19.6,23.5
NetC508_1 on Top Layer "3V3_SwitchOut" (solid, remove dead copper, pour order 41): 31.7,23.7 31.7,20.3 29.7,18.3 29.7,17.9 31.5,17.9 31.5,15.9 26.8,15.9 26.8,18.6 28.5,20.3 28.5,23.7
NetC517_1 on Top Layer "1V8_SwitchOut" (solid, remove dead copper, pour order 38): 31.7,7.5 31.7,10.9 29.7,12.9 29.7,13.3 31.5,13.3 31.5,15.3 26.8,15.3 26.8,12.6 28.5,10.9 28.5,7.5
GND on Internal Plane 1 (split plane): 99.49,0.51 0.51,0.51 0.51,101.09 99.49,101.09
3V3D on Internal Plane 2 (split plane): 99.49,0.51 0.51,0.51 0.51,101.09 99.49,101.09
5VD on Internal Plane 3 (split plane): 99.49,0.51 0.51,0.51 0.51,101.09 99.49,101.09
GND on Internal Plane 4 (split plane): 99.49,0.51 0.51,0.51 0.51,101.09 99.49,101.09

## Text inside footprints (layer, text, board x,y; h text height)
ST2: Top Overlay "1" at 66.144,14.964 h1.52 r180